# EAGLE board Datalore-IP-m4-100mil-a (EAGLE 9.1.0)
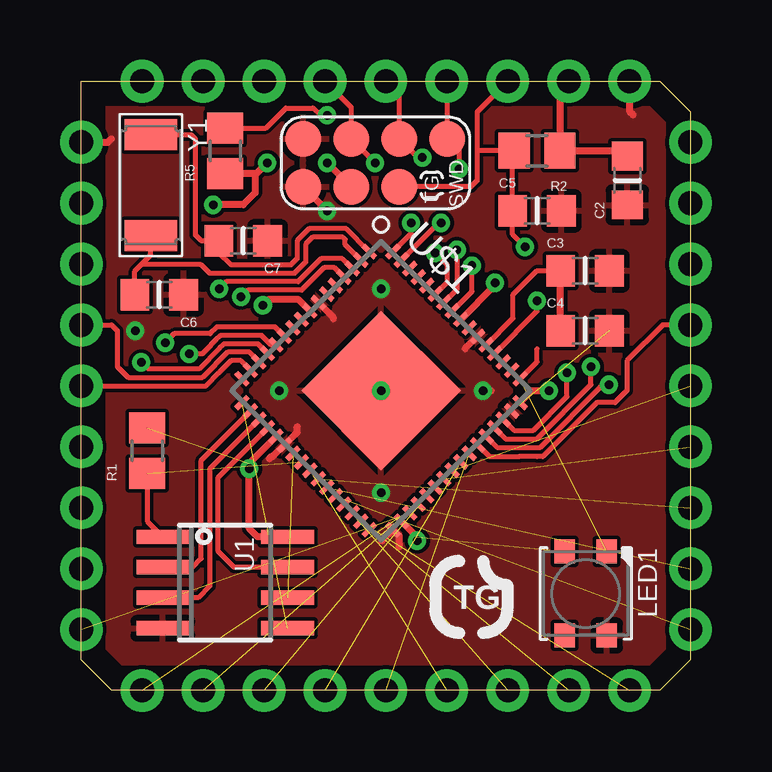
[diagram p0: board, top side]
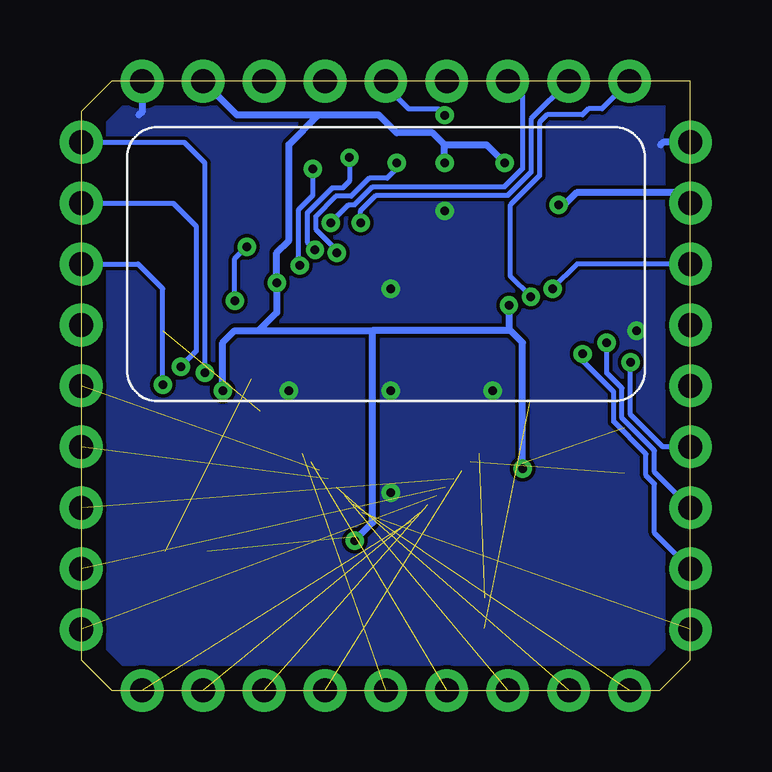
[diagram p1: board, bottom side, seen from below]

Size 25.4 x 25.4 mm. Coordinates in mm from the lower left corner, seen from the top.
Copper layers (1*16): Top 0.035mm / dielectric 1.5mm / Bottom 0.035mm
Design rules "default": minimum track width 6mil, minimum drill 0.35mm, track to track 6mil, track to pad 6mil, pad to pad 6mil, via to via 6mil, smd to smd 6mil, copper to edge 40mil, drill to drill 6mil, minimum pad ring 10mil, minimum via ring 8mil, stop-mask expansion 4mil, vias tented up to drill 0mil, thermal gap 10mil

## Footprints (pad centres in the part's own frame; a part is rotated, then mirrored left to right if it is on the bottom)
TG-C0805MP = smd 1.2 x 1.3: 1 -1.016,0; 2 1.016,0
LED3535 = smd 1 x 0.85: 1 -1.75,0.875; 2 -1.75,-0.875; 3 1.75,-0.875; 4 1.75,0.875
DL_IP_36-100MIL-PACKAGE = drill 1 pad 1.778: 1 -10.16,12.7; 2 -7.62,12.7; 3 -5.08,12.7; 4 -2.54,12.7; 5 0,12.7; 6 2.54,12.7; 7 5.08,12.7; 8 7.62,12.7; 9 10.16,12.7; 10 12.7,10.16; 11 12.7,7.62; 12 12.7,5.08; 13 12.7,2.54; 14 12.7,0; 15 12.7,-2.54; 16 12.7,-5.08; 17 12.7,-7.62; 18 12.7,-10.16; 19 10.16,-12.7; 20 7.62,-12.7; 21 5.08,-12.7; 22 2.54,-12.7; 23 0,-12.7; 24 -2.54,-12.7; 25 -5.08,-12.7; 26 -7.62,-12.7; 27 -10.16,-12.7; 28 -12.7,-10.16; 29 -12.7,-7.62; 30 -12.7,-5.08; 31 -12.7,-2.54; 32 -12.7,0; 33 -12.7,2.54; 34 -12.7,5.08; 35 -12.7,7.62; 36 -12.7,10.16
TG-R0805 = smd 1.3 x 1.5: 1 -0.95,0; 2 0.95,0
SOIC8_150MIL = smd 0.6 x 2.2: 1 -1.905,-2.6; 2 -0.635,-2.6; 3 0.635,-2.6; 4 1.905,-2.6; 5 1.905,2.6; 6 0.635,2.6; 7 -0.635,2.6; 8 -1.905,2.6
MICROBUILDER_PQFN64-1 = smd 0.7 x 0.22: 1 -4.45,3.75; 2 -4.45,3.25; 3 -4.45,2.75; 4 -4.45,2.25; 5 -4.45,1.75; 6 -4.45,1.25; 7 -4.45,0.75; 8 -4.45,0.25; 9 -4.45,-0.25; 10 -4.45,-0.75; 11 -4.45,-1.25; 12 -4.45,-1.75; 13 -4.45,-2.25; 14 -4.45,-2.75; 15 -4.45,-3.25; 16 -4.45,-3.75; 33 4.45,-3.75; 34 4.45,-3.25; 35 4.45,-2.75; 36 4.45,-2.25; 37 4.45,-1.75; 38 4.45,-1.25; 39 4.45,-0.75; 40 4.45,-0.25; 41 4.45,0.25; 42 4.45,0.75; 43 4.45,1.25; 44 4.45,1.75; 45 4.45,2.25; 46 4.45,2.75; 47 4.45,3.25; 48 4.45,3.75 | smd 0.22 x 0.7: 17 -3.75,-4.45; 18 -3.25,-4.45; 19 -2.75,-4.45; 20 -2.25,-4.45; 21 -1.75,-4.45; 22 -1.25,-4.45; 23 -0.75,-4.45; 24 -0.25,-4.45; 25 0.25,-4.45; 26 0.75,-4.45; 27 1.25,-4.45; 28 1.75,-4.45; 29 2.25,-4.45; 30 2.75,-4.45; 31 3.25,-4.45; 32 3.75,-4.45; 49 3.75,4.45; 50 3.25,4.45; 51 2.75,4.45; 52 2.25,4.45; 53 1.75,4.45; 54 1.25,4.45; 55 0.75,4.45; 56 0.25,4.45; 57 -0.25,4.45; 58 -0.75,4.45; 59 -1.25,4.45; 60 -1.75,4.45; 61 -2.25,4.45; 62 -2.75,4.45; 63 -3.25,4.45; 64 -3.75,4.45 | smd 4.7 x 4.7: EXP 0,0
SWD_POGO = smd 1.5 x 1.5: 1 -1,-2; 2 -1,0; 3 -1,2; 4 -1,4; 5 1,-2; 6 1,0; 7 1,2
MICROBUILDER_CRYSTAL_4.9X1.8 = smd 1.3 x 2.2: 1 -2.1,0; 2 2.1,0

## Placement (x,y rotation side)
C2  1uf  [TG-C0805MP]  22.77,21.26 90 top
C3  100nf  [TG-C0805MP]  21,17.5 0 top
C4  4.7uf  [TG-C0805MP]  21,15 0 top
C5  .1uf  [TG-C0805MP]  19,20 0 top
C6  22pf  [TG-C0805MP]  3.25,16.5 180 top
C7  22pf  [TG-C0805MP]  6.75,18.75 180 top
LED1  LED-NEO-WS2812B3535  [LED3535]  21.03,4.04 270 top
PKG1  [DL_IP_36-100MIL-PACKAGE]  12.7,12.7 0 top
R1  10k  [TG-R0805]  2.75,10 90 top
R2  10k  [TG-R0805]  19,22.5 180 top
R5  1k  [TG-R0805]  6,22.5 90 top
U1  [SOIC8_150MIL]  6,4.5 270 top
U$1  MCU-ATSAMD51J-ADAADA  [MICROBUILDER_PQFN64-1]  12.5,12.5 315 top
U$4  SWD_POGO  [SWD_POGO]  11.25,22 270 top
U$5  LOGO-TG_TECHIEBIG?  [LOGO_TG_TEST_LARGE]  16.26,2.4 0 top
Y1  [MICROBUILDER_CRYSTAL_4.9X1.8]  2.9,21.07 270 top

## Library data of the parts
C2-C7 LED1 R1 R2 R5 U1 U$1 Y1 = 0TG-Lib v01.3
PKG1 = Datalore dev lib
U$4 = board packages dev
U$5 = 0TG-Lib v01.4

## Nets
3V3: C2.2 LED1.2 PKG1.8 PKG1.35 R1.2 R2.1 R5.1 U1.8 U$1.8 U$1.21 U$1.34 U$1.48 U$1.56 U$4.6
A0: PKG1.34 U$1.3
A1: PKG1.33 U$1.14
A2: PKG1.32 U$1.15
A3: PKG1.31 U$1.13
A4: PKG1.30 U$1.11
A5: PKG1.29 U$1.12
AREF: PKG1.1 U$1.4
D0: PKG1.12 U$1.44
D1: PKG1.13 U$1.43
D2: PKG1.14 U$1.40
D3: PKG1.15 U$1.39
D4: PKG1.16 U$1.26
D5: PKG1.17 U$1.27
D6: PKG1.18 U$1.28
D7: PKG1.22 U$1.25
D8: PKG1.23 U$1.42
D9: PKG1.24 U$1.41
D10: PKG1.25 U$1.37
D11: PKG1.26 U$1.38
D12: PKG1.27 U$1.36
D13: PKG1.28 U$1.35
D+: PKG1.10 U$1.46
D-: PKG1.11 U$1.45
FLASH_CS: R1.1 U1.1 U$1.24
FLASH_IO0: U1.5 U$1.17
FLASH_IO1: U1.2 U$1.18
FLASH_IO2: U1.3 U$1.19
FLASH_IO3: U1.7 U$1.20
FLASH_SCK: U1.6 U$1.23
GND: C2.1 C3.2 C4.2 C5.2 C6.1 C7.1 LED1.4 PKG1.9 PKG1.36 U1.4 U$1.7 U$1.22 U$1.33 U$1.47 U$1.54 U$1.EXP U$4.1 U$4.5
MISO: PKG1.19 U$1.31
MOSI: PKG1.21 U$1.29
N$1: U$1.16
N$2: U$1.32
N$3: U$1.51
N$4: U$1.61
N$5: U$1.62
N$6: U$1.5
N$7: U$1.6
N$8: U$1.9
N$9: U$1.10
N$10: U$1.50
N$11: U$1.60
N$12: U$1.55
NEO_OUT: LED1.3
NEOPIX: LED1.1 U$1.49
RESET: C5.1 PKG1.7 R2.2 U$1.52 U$4.7
SCK: PKG1.20 U$1.30
SCL: PKG1.2 U$1.64
SDA: PKG1.3 U$1.63
SWDCLK: PKG1.6 U$1.57 U$4.4
SWDIO: PKG1.5 R5.2 U$1.58 U$4.3
SWO: PKG1.4 U$1.59 U$4.2
VCORE: C3.1 C4.1 U$1.53
XTAL0: C6.2 U$1.2 Y1.2
XTAL1: C7.2 U$1.1 Y1.1

## Tracks (layer width: path | path; a pad name or v marks a point on that pad's centre or on a via)
3V3  (via drill 0.35)  (2 unrouted)
  Top 0.3: PKG1.8 19.95,25.03 R2.1 22.55,22.5 C2.2 | U$1.8 9.06,16.29 7.8,16.29 v7.57,16.06 | U$4.6 v10.25,22 | R5.1 7.3,21.55 v7.75,22 7.25,21.5 7.25,20.75 6.75,20.25 v5.5,20.25 | U$1.56 17.25,16.9 v17.25,17 | U$1.48 18.79,12.5 v19.5,12.5 | U$1.21 7,9.47 v7,9.25 7,6.75 7.34,6.41 U1.8 | U$1.34 14,6.4 v14,6.25
  Bottom 0.3: PKG1.8 18.92,24 15.5,24 | 15.5,24 13,24 12.25,23.25 10.75,23.25 10.25,22.75 | v10.25,22 10.25,22.75 | 10.25,22.75 8.5,22.75 v7.75,22 | v5.5,20.25 5.25,20.25 4.75,20.75 0.43,20.75 PKG1.35 | 15.5,24 16.74,22.76 16.74,18.76 17.25,18.25 v17.25,17 17.25,15.75 18,15 | v14,6.25 13.25,7 13.25,15 | v7,9.25 7,14.5 7.5,15 | 7.5,15 13.25,15 | v19.5,12.5 19.5,14.5 19,15 18,15 | 18,15 13.25,15 | v7.57,16.06 7.57,15.07 7.5,15
A0  (via drill 0.35)
  Top 0.2: U$1.3 10.89,18 10,18 9.25,17.25 9.04,17.05 6.04,17.05 v5.75,16.75
  Bottom 0.2: PKG1.34 4.72,17.78 v5.75,16.75
A1
  Top 0.2: U$1.14 7.01,14.1 6.1,14.1 5.05,13.05 1.95,13.05 1.5,13.5 1.5,15 1.26,15.24 PKG1.33
A2
  Top 0.2: U$1.15 6.65,13.75 6.25,13.75 5.88,13.38 5.75,13.25 5.2,12.7 PKG1.32
A3  (via drill 0.35)
  Top 0.2: 5.75,14.25 5.96,14.46 7.36,14.46 U$1.13 | 5.75,14.25 | 5.75,14.25 4.91,13.4 2.78,13.4 v2.5,13.68
  Bottom 0.2: PKG1.31 1.16,10.16 2.5,11.5 v2.5,13.68
A4  (via drill 0.35)
  Top 0.2: U$1.11 8.07,15.16 5.66,15.16 5.38,14.87 3.87,14.87 v3.5,14.5
  Bottom 0.2: v3.5,14.5 3.5,13.25 2.85,12.6 2.85,11.35 1.5,10 1.5,9.12 PKG1.30
A5  (via drill 0.35)
  Top 0.2: U$1.12 7.92,14.41 7.52,14.81 5.81,14.81 5.61,14.6 5.6,14.6 5.4,14.4 5.4,14.39 5.04,14.04 v4.5,14.04
  Bottom 0.2: v4.5,14.04 4.5,13.75 3.21,12.46 3.21,11.21 1.85,9.86 1.85,8.97 1.5,8.62 1.5,6.58 PKG1.29
AREF  (via drill 0.35)
  Top 0.2: U$1.4 10.56,17.63 10.12,17.63 9.19,16.69 6.94,16.69 v6.66,16.41
  Bottom 0.2: v6.66,16.41 7.5,17.26 7.5,20.25 6.29,21.46 6.29,23.69 5.98,24 4.5,24 4.25,24.25 3.69,24.25 PKG1.1
D0  (via drill 0.35)
  Top 0.2: U$1.44 17.33,10.14 19.14,10.14 21.75,12.75 v22,12.75
  Bottom 0.2: PKG1.12 23.03,17.78 22,16.75 v22,12.75
D1
  Top 0.2: U$1.43 17.02,9.75 18,9.75 18.25,9.75 19,9.75 19.25,9.75 21.5,12 22.25,12 22.75,12.5 22.75,13.75 24.24,15.24 PKG1.13
D2  (1 unrouted)
D3  (1 unrouted)
D4  (1 unrouted)
D5  (1 unrouted)
D6  (1 unrouted)
D7  (1 unrouted)
D8  (1 unrouted)
D9  (1 unrouted)
D10  (1 unrouted)
D11  (1 unrouted)
D12  (1 unrouted)
D13  (1 unrouted)
D+  (via drill 0.35)
  Top 0.2: U$1.46 18.04,10.85 18.85,10.85 20.25,12.25 v20.25,13.25
  Bottom 0.2: v20.25,13.25 20.25,22 21.11,22.86 PKG1.10
D-  (via drill 0.35)
  Top 0.2: U$1.45 17.69,10.49 18.99,10.49 21.25,12.75 v21.25,13.5
  Bottom 0.2: v21.25,13.5 20.6,14.15 20.6,19.35 21.57,20.32 PKG1.11
FLASH_CS  (1 unrouted)
  Top 0.2: R1.1 2.75,7.05 U1.1
FLASH_IO0  (1 unrouted)
FLASH_IO1
  Top 0.2: U1.2 4.63,5.13 5,5.5 5,9.6 U$1.18
FLASH_IO2
  Top 0.2: U$1.19 5.35,9.24 5.35,4.35 4.87,3.87 U1.3
FLASH_IO3
  Top 0.2: U$1.20 5.71,8.89 5.71,5.79 6.37,5.13 U1.7
FLASH_SCK  (1 unrouted)
GND  (via drill 0.35)  (1 unrouted)
  Top 0.3: PKG1.9 22.86,24.14 23,24 | PKG1.36 1.11,22.86 1.25,23 | U$4.5 v10.25,20 | 17.1,12.5 v16.75,12.5 | U$1.54 16.51,14.76 16,14.25 | U$1.7 10.5,15.56 10.5,15.5 | 9,11 9,10.77 U$1.22 7.98,9.75 7.92,9.75 7.83,9.67 | 13.25,6 13.25,6.45 U$1.33 12.54,6.25 12.5,6.25
  Bottom 0.3: PKG1.9 22.86,24.14 23,24 | PKG1.36 1.14,22.86 1.25,22.75
  other vias: 8.25,12.5 12.5,16.75 12.5,8.25 12.5,12.5 2.25,15
  pour Top: -2,27 -2,-2 27,-2 27,27
  pour Bottom: -3,28 -3,-3 28,-3 28,28
MISO  (1 unrouted)
MOSI  (1 unrouted)
NEOPIX  (1 unrouted)
  Top 0.2: U$1.49 19,13.7 19,14.25
RESET  (via drill 0.35)
  Top 0.2: PKG1.7 16.5,24.12 16.5,22.5 | 16.5,22.5 R2.2 17.98,22.43 C5.1 17.98,19.02 v18.5,18.5 | 16.5,22.5 16.5,21.25 16.25,21 U$4.7 | U$1.52 19,15.82 v19,16.25
  Bottom 0.2: v19,16.25 19,18 v18.5,18.5
SCK  (1 unrouted)
SCL  (via drill 0.35)
  Top 0.2: U$1.64 13.75,19.05 v13.75,19.5
  Bottom 0.2: v13.75,19.5 13.75,20 13.1,20.65 7.6,20.65 6.65,21.6 6.65,23.83 PKG1.2
SDA  (via drill 0.35)
  Top 0.2: v15,19.5 14.9,19.5 U$1.63
  Bottom 0.2: PKG1.3 7,24.78 7,21.75 7.75,21 9.25,21 13.25,21 14,20.25 14.25,20.25 v15,19.5
SWDCLK  (via drill 0.35)
  Top 0.2: PKG1.6 U$4.4 15.75,22.5 v15.75,21.75 | U$1.57 16.29,16.64 v16.29,17.72
  Bottom 0.2: v15.75,21.75 15.75,20.64 16.34,20.05 16.34,17.77 v16.29,17.72
SWDIO  (via drill 0.35)
  Top 0.2: PKG1.5 13.25,24.85 U$4.3 14.03,22.22 v14.22,22.22 | v10.25,23.98 9.96,23.98 9.66,24.28 8.53,24.28 7.7,23.45 R5.2 | v15.66,18.38 15.66,16.72 U$1.58
  Bottom 0.2: PKG1.5 12.7,25.2 11.75,24.25 10.52,24.25 v10.25,23.98 | v14.22,22.22 14.22,21.23 14.5,20.95 14.94,20.95 15.98,19.91 15.98,18.7 v15.66,18.38
SWO  (via drill 0.35)
  Top 0.2: 11,23.25 U$4.2 | PKG1.4 11.25,24.31 U$4.2 | U$4.2 v12.25,22 | v14.75,18.25 15.25,17.75 15.25,17.02 U$1.59
  Bottom 0.2: v12.25,22 12.25,21.75 12.65,21.35 13.39,21.35 14.14,20.6 14.79,20.6 15.63,19.76 15.63,19.24 14.75,18.36 v14.75,18.25
VCORE
  Top 0.2: U$1.53 18,15.53 18,16.5 19,17.5 C3.1
  Top 0.3: C4.1 C3.1
XTAL0
  Top 0.2: 3.12,18.75 Y1.2 2.9,18.15 2.5,17.75 | C6.2 2.23,17.48 2.5,17.75 | U$1.2 11,18.6 11,18.8 10.91,18.9 9.65,18.9 9.35,18.6 9.35,17.85 8.9,17.4 5.35,17.4 5,17.75 2.5,17.75
XTAL1
  Top 0.2: Y1.1 4.58,23.17 4.75,23 4.75,19 5,18.75 C7.2 5.73,18.27 6.25,17.75 8.75,17.75 9,18 9,18.75 9.5,19.25 11.05,19.25 U$1.1